# Altium PCB SPEED-CONTROLER.PcbDoc
Units mm, origin at the board's own origin, x right, y up, seen from the top; angles counter-clockwise.
Board outline 77.09 x 54.1 mm, 2 copper layers (Top Layer, Bottom Layer); 14 components, 11 nets, 43 pads, 0 vias.
Unrouted connection lines stored in the file: 2.
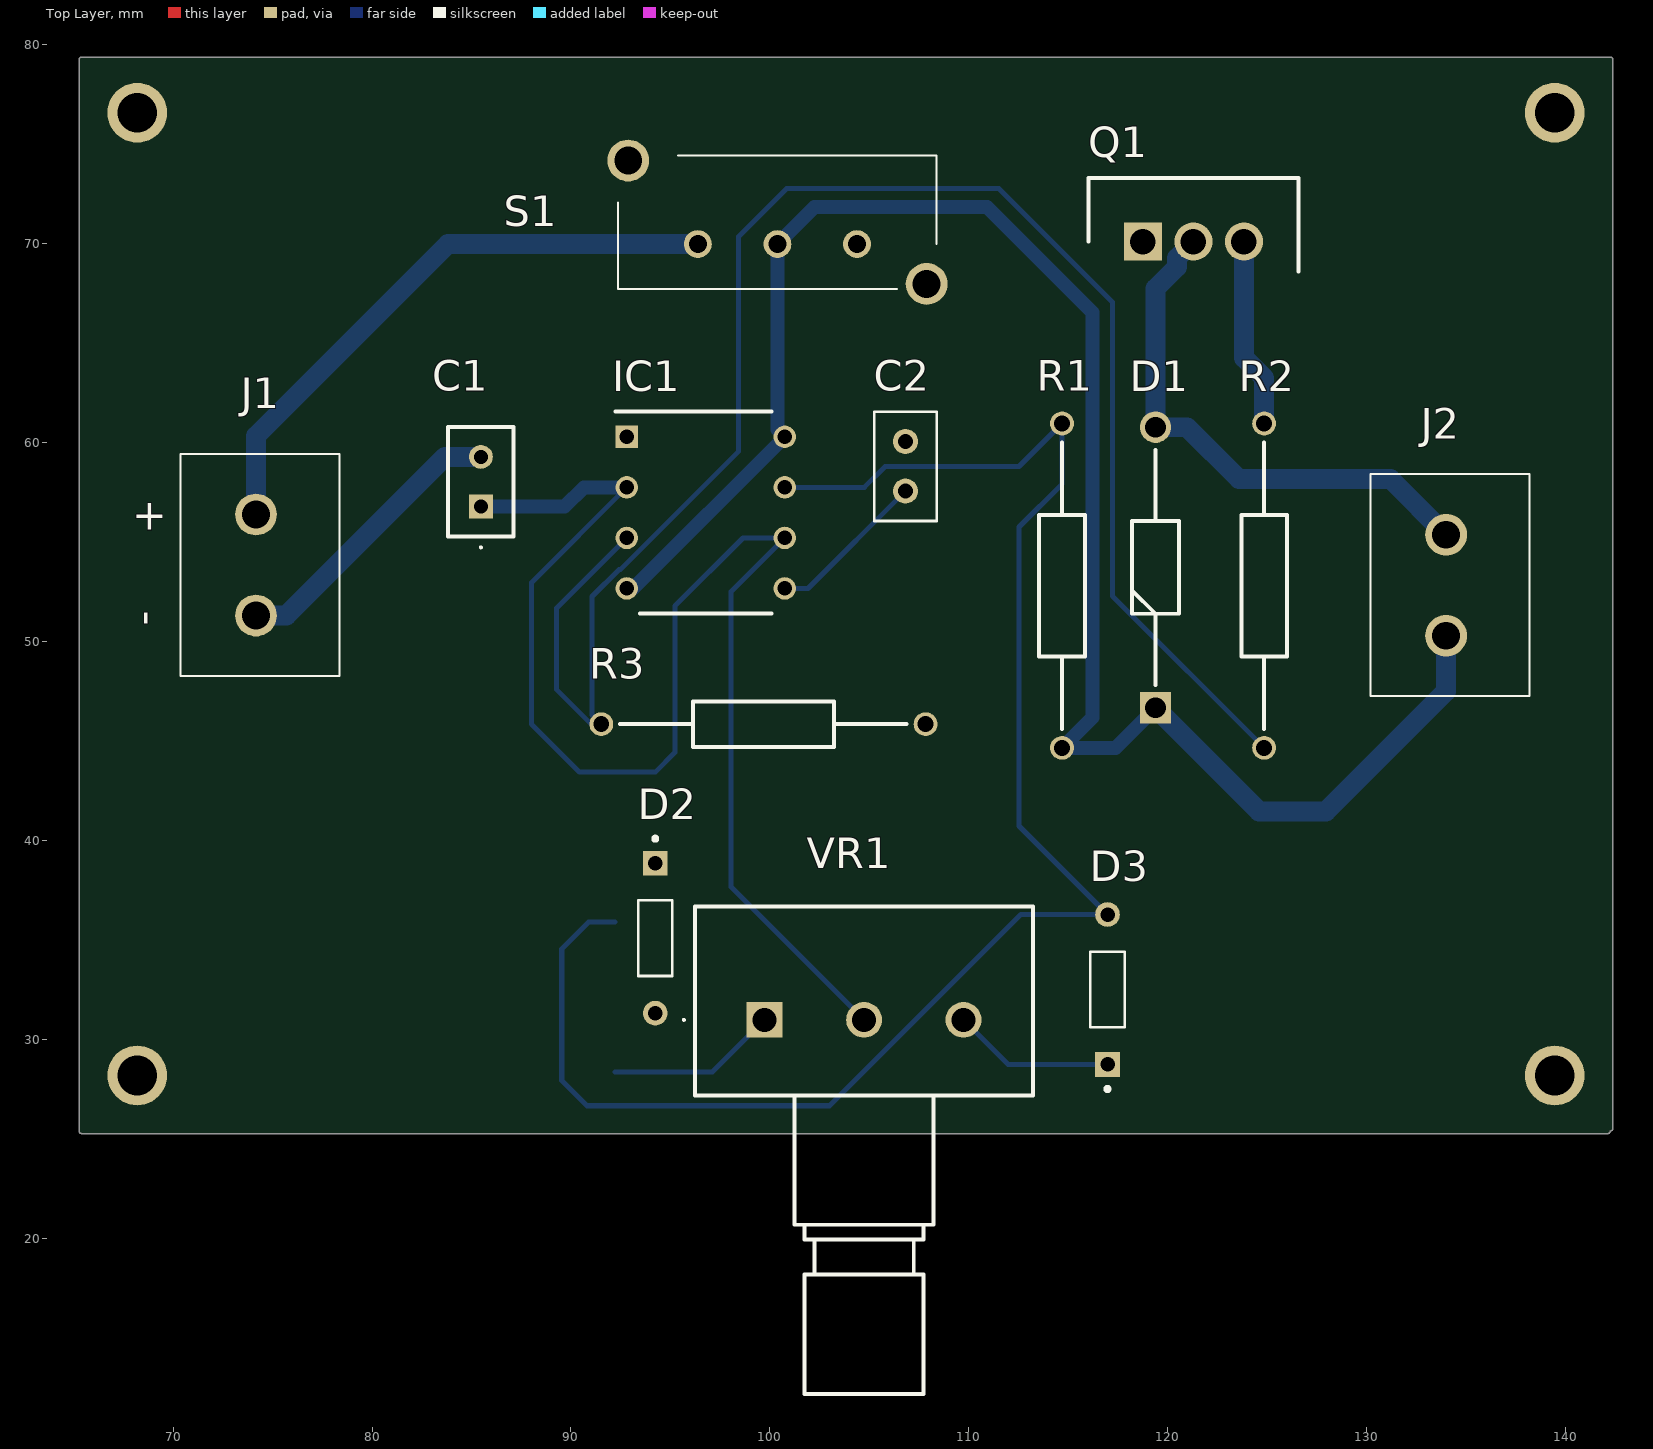
[diagram p0: Top Layer view]
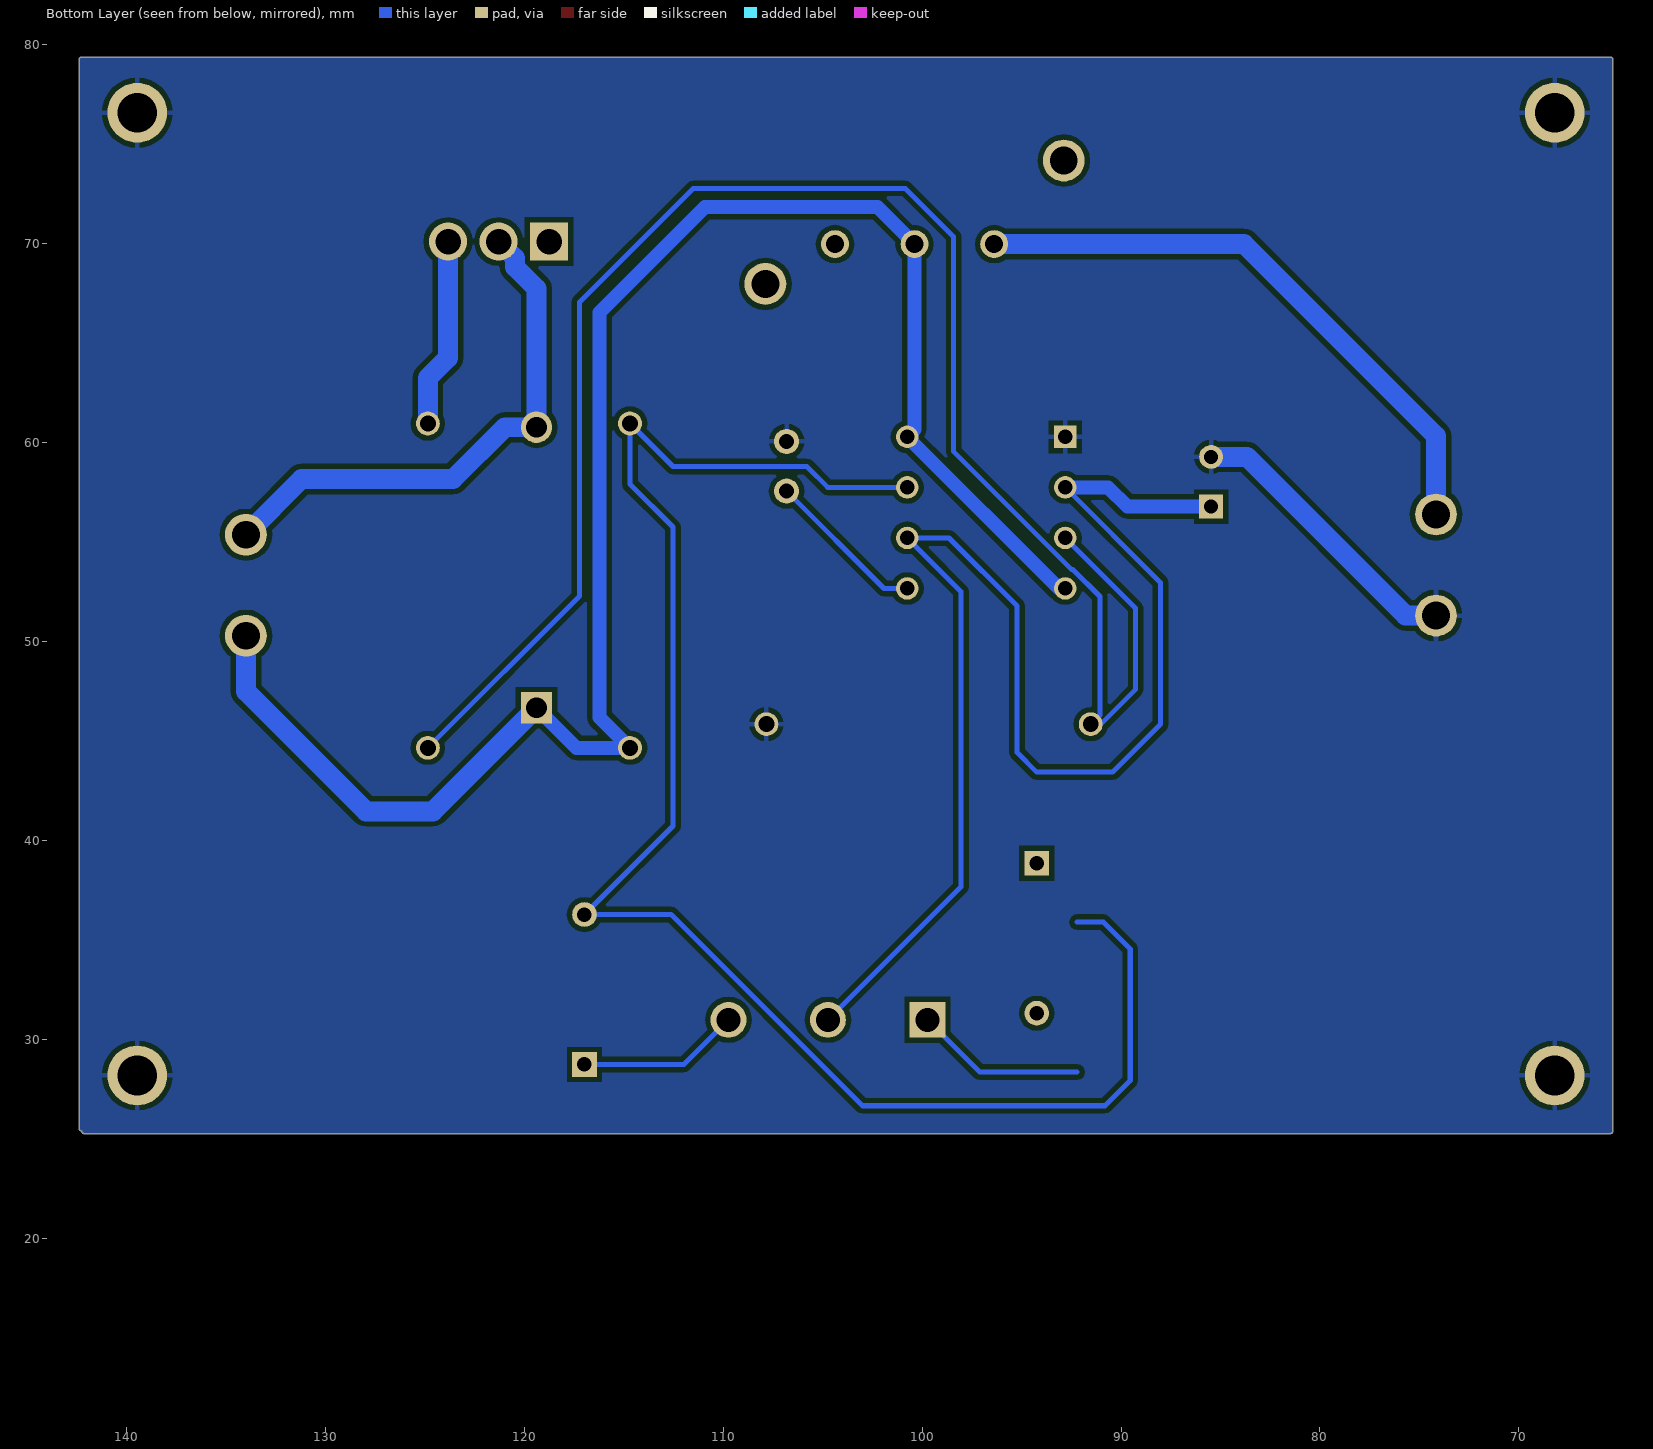
[diagram p1: Bottom Layer view, seen from below]
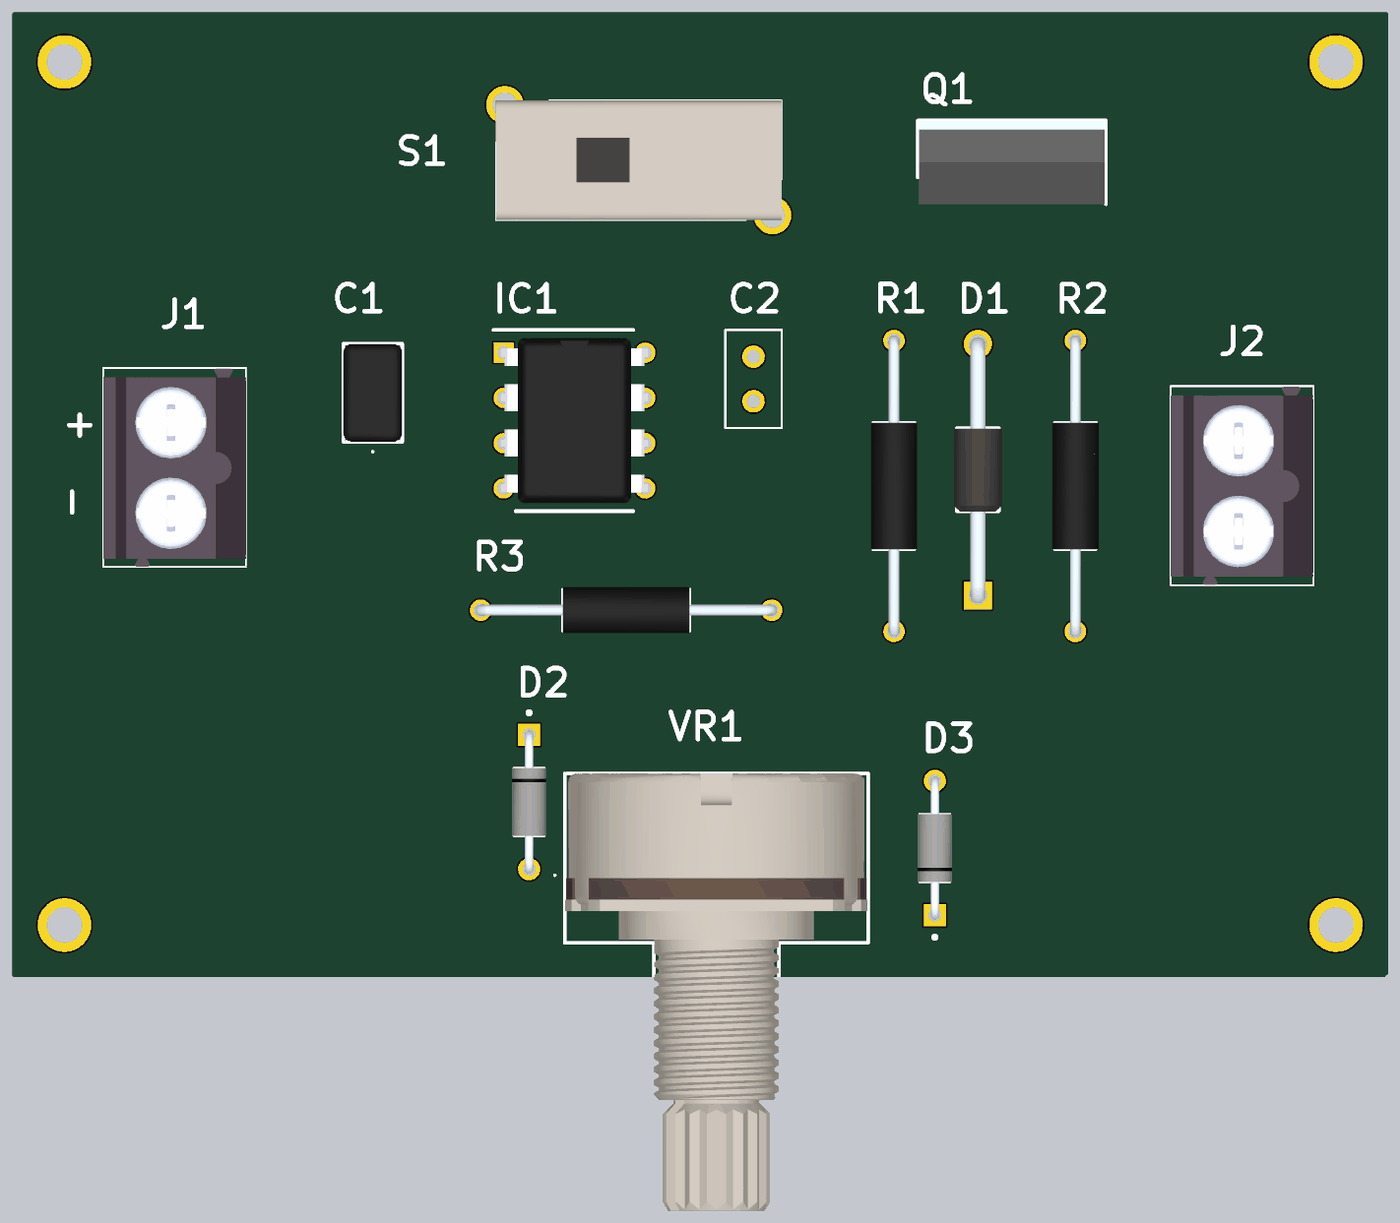
[diagram p2: 3D render of the assembled board from above, using the file's embedded part models]

## Layer stack, top to bottom
Top Solder: solder mask 0.0102, Solder Resist, Dk 3.5
Top Layer: signal copper 0.0356
Dielectric 1: dielectric 0.32, FR-4, Dk 4.8
Bottom Layer: signal copper 0.0356
Bottom Solder: solder mask 0.0102, Solder Resist, Dk 3.5

## Board outline
65.278,25.4 ccw(c65.405,25.4) 65.405,25.273 142.113,25.273 ccw(c142.113,25.4) 142.24,25.4 ccw(c142.24,25.527) 142.367,25.527 142.367,79.248 ccw(c142.24,79.248) 142.24,79.375 65.405,79.375 ccw(c65.405,79.248) 65.278,79.248

## Design rules (kind name [scope] priority, off if disabled: settings)
Clearance [All] p1: gap=0.254 ignorepadtopadclearanceinfootprint=FALSE except(0: Arc-Hole Track-Hole SMDPad-Hole THPad-Hole Via-Hole Fill-Hole Poly-Hole Region-Hole Text-Hole)
PolygonConnect [All] p1: connectstyle=Relief reliefconductorwidth=0.254 reliefentries=4 polygonreliefangle="90 Angle" airgapwidth=0.254
RoutingVias [All] p1: holewidth=0.711 width=1.27 viastyle="Through Hole" minholewidth=0.711 minwidth=1.27 maxholewidth=0.711 maxwidth=1.27
SolderMaskExpansion [All] p1: expansion=0.102
Width [All] p1: maxlimit=1 minlimit=0.254 preferedwidth=0.7
30 further rules are at their usual default settings.

## Components (designator, comment, footprint, x,y, rotation, side; value= is the part's Value field where it differs from the comment)
C1 "RHS7J2D103J2DGH01A" RHS7J2D103J2DGH01A 85.471,56.785 r90 top
C2 "RCE5C1H104J2A2H03B" CAP_RCE5C1H104J2A2H03B 106.807,58.81 r90 top
D1 "1N4007-E3_73" DIOAD1405W86L465D235 119.38,46.673 r90 top
D2 "1N4148,133" DIOAD753W49L380D172B 94.234,35.094 r270 top
D3 "1N4148,133" DIOAD753W49L380D172B 116.967,32.512 r90 top
IC1 "LM555CN_NOPB" DIP794W53P254L959H508Q8N 96.774,56.48 r0 top
J1 "1760510000" 1760510000 74.168,51.308 r90 top
J2 "1760510000" 1760510000 133.985,50.292 r90 top
Q1 "IRFZ24NPBF" TO254P469X1042X1967-3P 118.745,70.104 r0 top
R1 "MF1_4DCT26A1001F" RESAD1630W60L710D230 114.681,44.66 r90 top
R2 "MF1_4DCT26A1001F" RESAD1630W60L710D230 124.841,44.66 r90 top
R3 "MF1_4DCT26A1001F" RESAD1630W60L710D230 91.523,45.847 r0 top
S1 "MHS12204" MHS12204 96.375,69.977 r180 top
VR1 "P160KN-2QC15B10K" P160KN2QC15B10K 99.728,30.988 r0 top

## Footprints (in the part's own frame and the unit in brackets; to place one, negate y for a bottom-side part, rotate by r counter-clockwise, add the part's x,y. Pads: shape width x height; smd on the part's side, far side on the other; paste and mask are expansions set on the pad)
1760510000 [mm]
  round 2.1 hole 1.4: 1(0,0) 2(5.08,0)
  silkscreen extent -3.04,-4.2 8.12,3.8, body extent -3.02,-4.2 8.09,3.8, height 9.11
CAP_RCE5C1H104J2A2H03B [mm]
  round 1.258 hole 0.75: 1(-1.25,0) 2(1.25,0)
  silkscreen extent -2.75,-1.58 2.75,1.58
DIOAD753W49L380D172B [mm]
  round 1.238 hole 0.73: A(3.768,0)
  rect 1.238x1.238 / inner round 1.238 / far side rect 1.238x1.238 hole 0.73: K(-3.768,0)
  silkscreen extent -5.1,-0.86 1.9,0.86, body extent -4,-0.95 4,0.95, height 1.91
DIOAD1405W86L465D235 [mm]
  rect 1.575x1.575 hole 1.05: 1(0,0)
  round 1.575 hole 1.05: 2(14.1,0)
  silkscreen extent 1.14,-1.17 12.96,1.17, body extent -0.43,-1.35 14.48,1.35, height 2.69
DIP794W53P254L959H508Q8N [mm]
  rect 1.13x1.13 hole 0.73: 1(-3.97,3.81)
  round 1.13 hole 0.73: 2(-3.97,1.27) 3(-3.97,-1.27) 4(-3.97,-3.81) 5(3.97,-3.81) 6(3.97,-1.27) 7(3.97,1.27) 8(3.97,3.81)
  silkscreen extent -4.53,-5.08 3.3,5.08, body extent -4.1,-4.64 4.1,4.64, height 4.21
MHS12204 [mm]
  round 1.4 hole 0.9: 1(0,0) 2(-4,0) 3(-8,0)
  round 2.1 hole 1.4: MH1(-11.5,2) MH2(3.5,-4.2)
  silkscreen extent -12,-4.45 4,2.25, body extent -12,-4.45 4,2.25, height 12.48
P160KN2QC15B10K [mm]
  rect 1.8x1.8 hole 1.2: 1(0,0)
  round 1.8 hole 1.2: 2(5,0) 3(10,0)
  silkscreen extent -4.1,-18.8 13.5,5.7, body extent -3.51,-18.8 13.51,5.71, height 21.01
RESAD1630W60L710D230 [mm]
  round 1.2 hole 0.8: 1(0,0) 2(16.3,0)
  silkscreen extent 0.95,-1.15 15.35,1.15, body extent -0.3,-1.3 16.6,1.3, height 2.59
RHS7J2D103J2DGH01A [mm]
  rect 1.2x1.2 hole 0.7: 1(0,0)
  round 1.2 hole 0.7: 2(2.5,0)
  silkscreen extent -2.1,-1.65 4,1.65, body extent -1.5,-1.65 4,1.65, height 6.63
TO254P469X1042X1967-3P [mm]
  rect 1.92x1.92 hole 1.28: 1(0,0)
  round 1.92 hole 1.28: 2(2.54,0) 3(5.08,0)
  silkscreen extent -2.73,-1.5 7.81,3.19, body extent -2.67,-1.5 7.75,3.19, height 18.84

## Part data
C1: "Capacitor", Manufacturer_Name="Murata Electronics", Mouser Part Number=81-RHS7J2D103J2DGH1A, Arrow Part Number=RHS7J2D103J2DGH01A, Arrow Price/Stock=https://www.arrow.com/en/products/rhs7j2d103j2dgh01a/murata-manufacturing?region=nac, Datasheet Link=https://search.murata.co.jp/Ceramy/image/img/A01X/G101/ENG/RHS_UNJ_200V_500V_E.pdf, Height=3.3mm, Manufacturer_Part_Number=RHS7J2D103J2DGH01A, Mouser Price/Stock=https://www.mouser.co.uk/ProductDetail/Murata-Electronics/RHS7J2D103J2DGH01A?qs=xhbEVWpZdWd37zfbUob1kg%3D%3D
C2: "Multilayer Ceramic Capacitors MLCC - Leaded", Package=None, Availability=Unavailable, MP=RCE5C1H104J2A2H03B, Price=None
D1: "Diode", Arrow Part Number=1N4007-E3/73, Manufacturer_Name=Vishay, Mouser Part Number=625-1N4007-E3/73, Arrow Price/Stock=https://www.arrow.com/en/products/1n4007-e373/vishay?utm_currency=USD&region=europe, Datasheet Link=https://mouser.componentsearchengine.com/Datasheets/2/1N4007-E3_73.pdf, Manufacturer_Part_Number=1N4007-E3/73, Mouser Price/Stock=https://www.mouser.co.uk/ProductDetail/Vishay-General-Semiconductor/1N4007-E3-73?qs=N4vtoAxH%2FSqT3Ng3e4K0Gw%3D%3D
D2 D3: library part 1N4148, "Diode Standard 75V 200mA Surface Mount SOD-523F", Package="AXIAL LEAD-2 ON Semiconductor", Check_prices=https://www.snapeda.com/parts/1N4148/Onsemi/view-part/?ref=eda, MF="ON Semiconductor", MP=1N4148, SnapEDA_Link=https://www.snapeda.com/parts/1N4148/Onsemi/view-part/?ref=snap
IC1: "Integrated Circuit", Arrow Part Number=LM555CN/NOPB, Manufacturer_Name="Texas Instruments", Mouser Part Number=926-LM555CN/NOPB, Arrow Price/Stock=https://www.arrow.com/en/products/lm555cnnopb/texas-instruments?utm_currency=USD&region=nac, Datasheet Link=https://datasheet.datasheetarchive.com/originals/distributors/Datasheets-SFU2/DSASFU100035550.pdf, Height=5.08mm, Manufacturer_Part_Number=LM555CN/NOPB, Mouser Price/Stock=https://www.mouser.co.uk/ProductDetail/Texas-Instruments/LM555CN-NOPB?qs=QbsRYf82W3GjZpQL%2FakZOg%3D%3D
J1 J2: "Connector", Manufacturer_Name=Weidmuller, Mouser Part Number=470-1760510000, Datasheet Link=http://catalog.weidmueller.com/createDatasheetForMobile.do?ordernumber=1760510000&scope1=1&scope2=1&localeId=en, Height=10mm, Manufacturer_Part_Number=1760510000, Mouser Price/Stock=https://www.mouser.co.uk/ProductDetail/Weidmuller/1760510000?qs=BTG2th8YmhTa8qcglSF3eg%3D%3D
Q1: "MOSFET (N-Channel)", Manufacturer_Name=Infineon, Mouser Part Number=942-IRFZ24NPBF, Arrow Part Number=IRFZ24NPBF, Arrow Price/Stock=https://www.arrow.com/en/products/irfz24npbf/infineon-technologies-ag?utm_currency=USD&region=europe, Datasheet Link=https://www.mouser.com/datasheet/2/196/irfz24npbf-1227512.pdf, Height=4.69mm, Manufacturer_Part_Number=IRFZ24NPBF, Mouser Price/Stock=https://www.mouser.co.uk/ProductDetail/Infineon-Technologies/IRFZ24NPBF?qs=9%252BKlkBgLFf0TQgSTtY4J0g%3D%3D
R1 R2 R3: "Resistor", Manufacturer_Name="KOA Speer", Manufacturer_Part_Number=MF1/4DCT26A1001F, Mouser Part Number=660-MF1/4DCT26A1001F, Datasheet Link=https://componentsearchengine.com/Datasheets/1/MF1_4DCT26A1001F.pdf, Mouser Price/Stock=https://www.mouser.co.uk/ProductDetail/KOA-Speer/MF1-4DCT26A1001F?qs=wVGympPcmnD9Oav1Pii0SQ%3D%3D
S1: "Switch", Manufacturer_Name="TE Connectivity", Mouser Part Number=506-MHS12204, Arrow Part Number=MHS12204, Arrow Price/Stock=https://www.arrow.com/en/products/mhs12204/te-connectivity?region=nac, Datasheet Link=https://www.te.com/commerce/DocumentDelivery/DDEController?Action=srchrtrv&DocNm=1825255&DocType=Customer+Drawing&DocLang=English&DocFormat=pdf&PartCntxt=1825255-1, Height=12mm, Manufacturer_Part_Number=MHS12204, Mouser Price/Stock=https://www.mouser.co.uk/ProductDetail/TE-Connectivity-Alcoswitch/MHS12204?qs=x%2FgbKjZ2T%2FPUluB%2FWhqq0Q%3D%3D
VR1: "Variable Resistor", Manufacturer_Name="TT Electronics", Mouser Part Number=374-P160KN-2QC15B10K, Datasheet Link=https://www.ttelectronics.com/TTElectronics/media/ProductFiles/Datasheet/P160.pdf, Height=21mm, Manufacturer_Part_Number=P160KN-2QC15B10K, Mouser Price/Stock=https://www.mouser.co.uk/ProductDetail/BI-Technologies-TT-Electronics/P160KN-2QC15B10K?qs=VOMQJJE%252BBNnCK26iGn%2FVdQ%3D%3D

## Free pads (board coordinates)
  round 3 hole 2: 1(68.199,76.581) 2(68.199,28.194) 3(139.446,28.194) 4(139.446,76.581)

## Nets (pads, with @x,y where several pads share a name; then routed paths per layer and width w, separated by ;. In a path a pad name is that pad's centre, name@x,y a point inside that pad or via, vN(x,y) a via of type N, cw(c..) or ccw(c..) an arc to the next point about the centre after c; other vN are vias at no path point)
+12: D1.1 IC1.4 IC1.8 J2.1 R1.1 S1.2 | length 89.8
  Bottom Layer w0.7: IC1.4 93.124,52.67 IC1.8 100.375,60.659 S1.2 102.235,71.837 110.916,71.837 116.205,66.548 116.205,46.184 R1.1 117.367,44.66 D1.1
  Bottom Layer w1: D1.1 124.587,41.466 127.953,41.466 133.985,47.498 J2.1
GND: C1.2 C2.2 IC1.1 J1.1 pad.1 pad.2 pad.3 pad.4 R3.2 | length 14.6
  Bottom Layer w1: J1.1 75.692,51.308 83.669,59.285 C1.2
NetC1_1: C1.1 IC1.2 IC1.6 VR1.2 | length 72.7
  Bottom Layer w0.254: IC1.2 88.011,52.957 88.011,45.847 90.424,43.434 94.234,43.434 95.221,44.421 95.221,51.787 98.644,55.21 IC1.6 98.044,52.51 98.044,37.672 VR1.2
  Bottom Layer w0.7: C1.1 89.678,56.785 90.643,57.75 IC1.2
NetC2_1: C2.1 IC1.5 | length 8.1
  Bottom Layer w0.254: IC1.5 101.917,52.67 C2.1
NetD1_2: D1.2 J2.2 Q1.2 | length 27.7
  Bottom Layer w0.254: J2.2@133.223,55.372 J2.2
  Bottom Layer w1: Q1.2 120.459,69.278 120.459,68.832 119.38,67.753 D1.2 120.964,60.773 123.571,58.166 131.191,58.166 J2.2
NetD2_A: D2.A VR1.1 | length 8.6
  Bottom Layer w0.254: 92.202,28.363 97.103,28.363 VR1.1
NetD2_K: D2.K D3.A IC1.7 R1.2 | length 84.5
  Bottom Layer w0.254: 92.202,35.899 90.89,35.899 89.535,34.544 89.535,27.94 90.805,26.67 102.997,26.67 112.607,36.28 D3.A 112.522,40.725 112.522,55.753 114.681,57.912 R1.2 112.522,58.801 105.791,58.801 104.74,57.75 IC1.7
NetD3_K: D3.K VR1.3 | length 8.2
  Bottom Layer w0.254: VR1.3 111.972,28.744 D3.K
NetIC1_3: IC1.3 R2.1 R3.1 | length 87.6
  Bottom Layer w0.254: IC1.3 89.281,51.687 89.281,47.581 91.015,45.847 R3.1 91.059,46.311 91.059,52.263 92.412,53.616 92.478,53.616 98.425,59.563 98.425,70.358 100.838,72.771 111.506,72.771 117.221,67.056 117.221,52.28 R2.1
NetJ1_2: J1.2 S1.1 | length 30.1
  Bottom Layer w1: J1.2 74.168,60.325 83.82,69.977 S1.1
NetQ1_3: Q1.3 R2.2 | length 9.6
  Bottom Layer w1: Q1.3 123.825,64.262 124.841,63.246 R2.2
pads on no net: Q1.1 S1.3 S1.MH1 S1.MH2

## Polygon pours and split planes (outlines as drawn)
GND on Bottom Layer "Top Layer-No Net" (solid, pour order 4): 65.278,25.4 ccw(c65.405,25.4) 65.405,25.273 142.113,25.273 ccw(c142.113,25.4) 142.24,25.4 ccw(c142.24,25.527) 142.367,25.527 142.367,79.248 ccw(c142.24,79.248) 142.24,79.375 65.405,79.375 ccw(c65.405,79.248) 65.278,79.248

## Silkscreen, mask and mechanical layers (free items; w line width, h text height)
Top Overlay:
  text "+" at 67.945,55.626 h1.52
  text "-" at 69.215,50.8 h1.52 r90
Mechanical 17:
  lines w0.254: 65.405,25.4 142.113,25.4 142.24,25.527 142.24,79.248 140.208,79.248 65.405,79.248 65.405,25.4